# Altium PCB 安装尺寸.PcbDoc
Units mm, origin at the board's own origin, x right, y up, seen from the top; angles counter-clockwise.
Board outline 250 x 140 mm, 2 copper layers (Top Layer, Bottom Layer); 1 components, 0 nets, 11 pads, 0 vias.
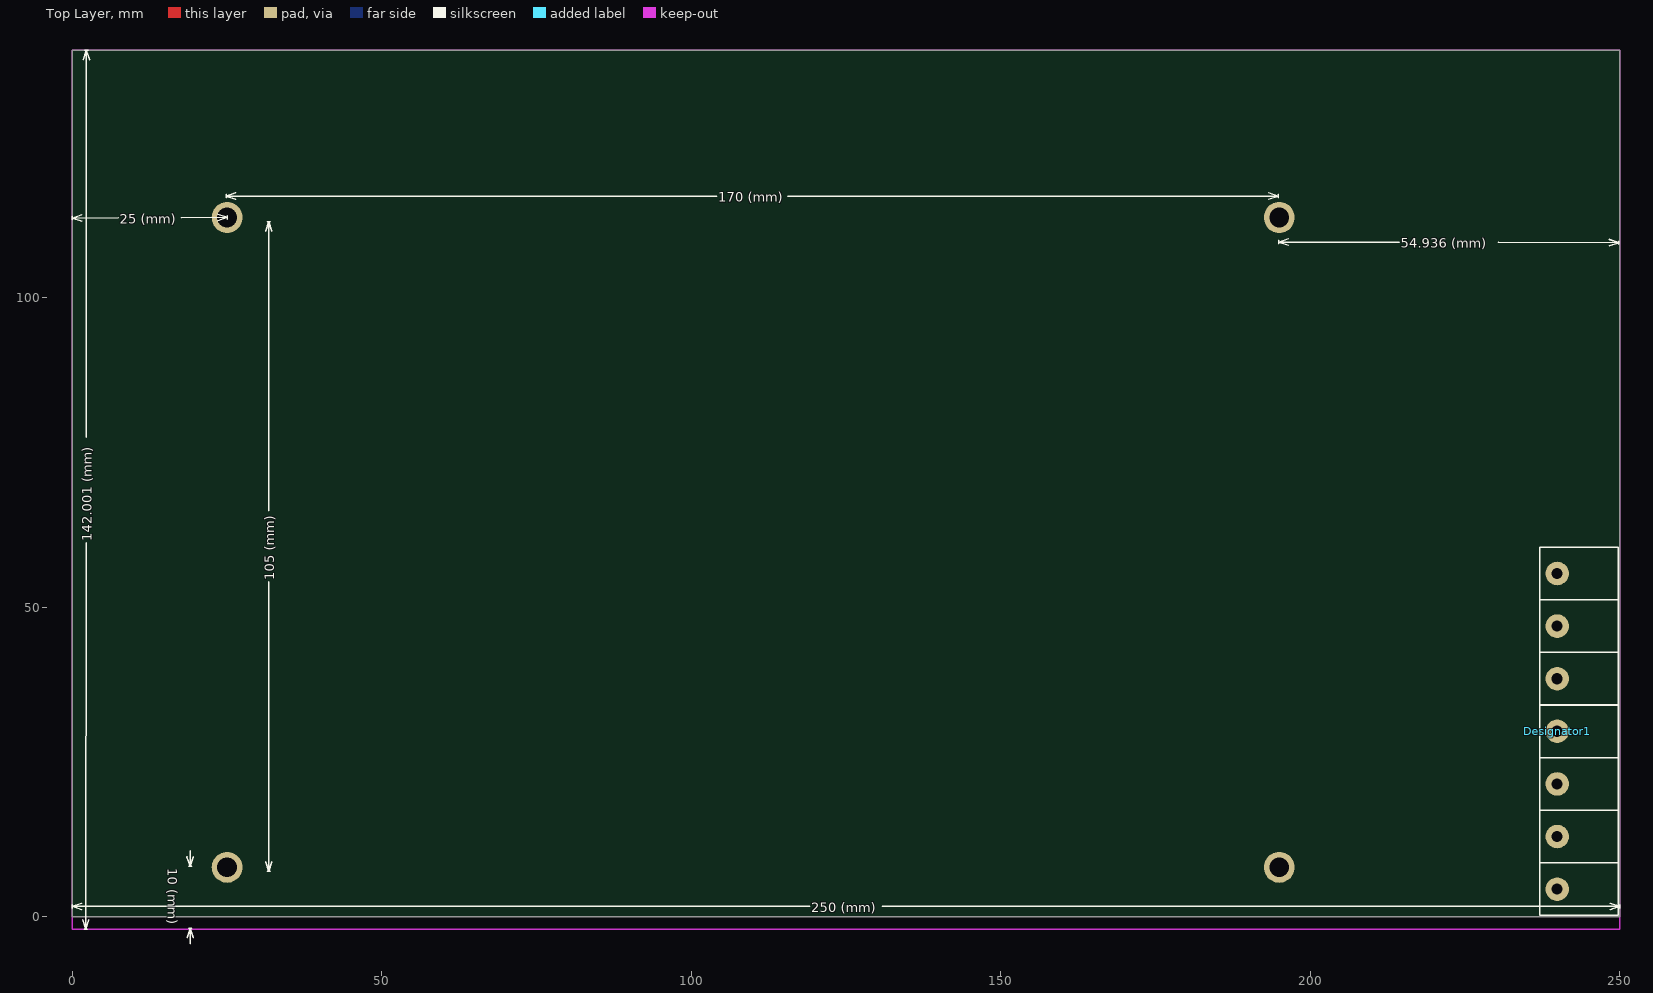
[diagram p0: Top Layer view]
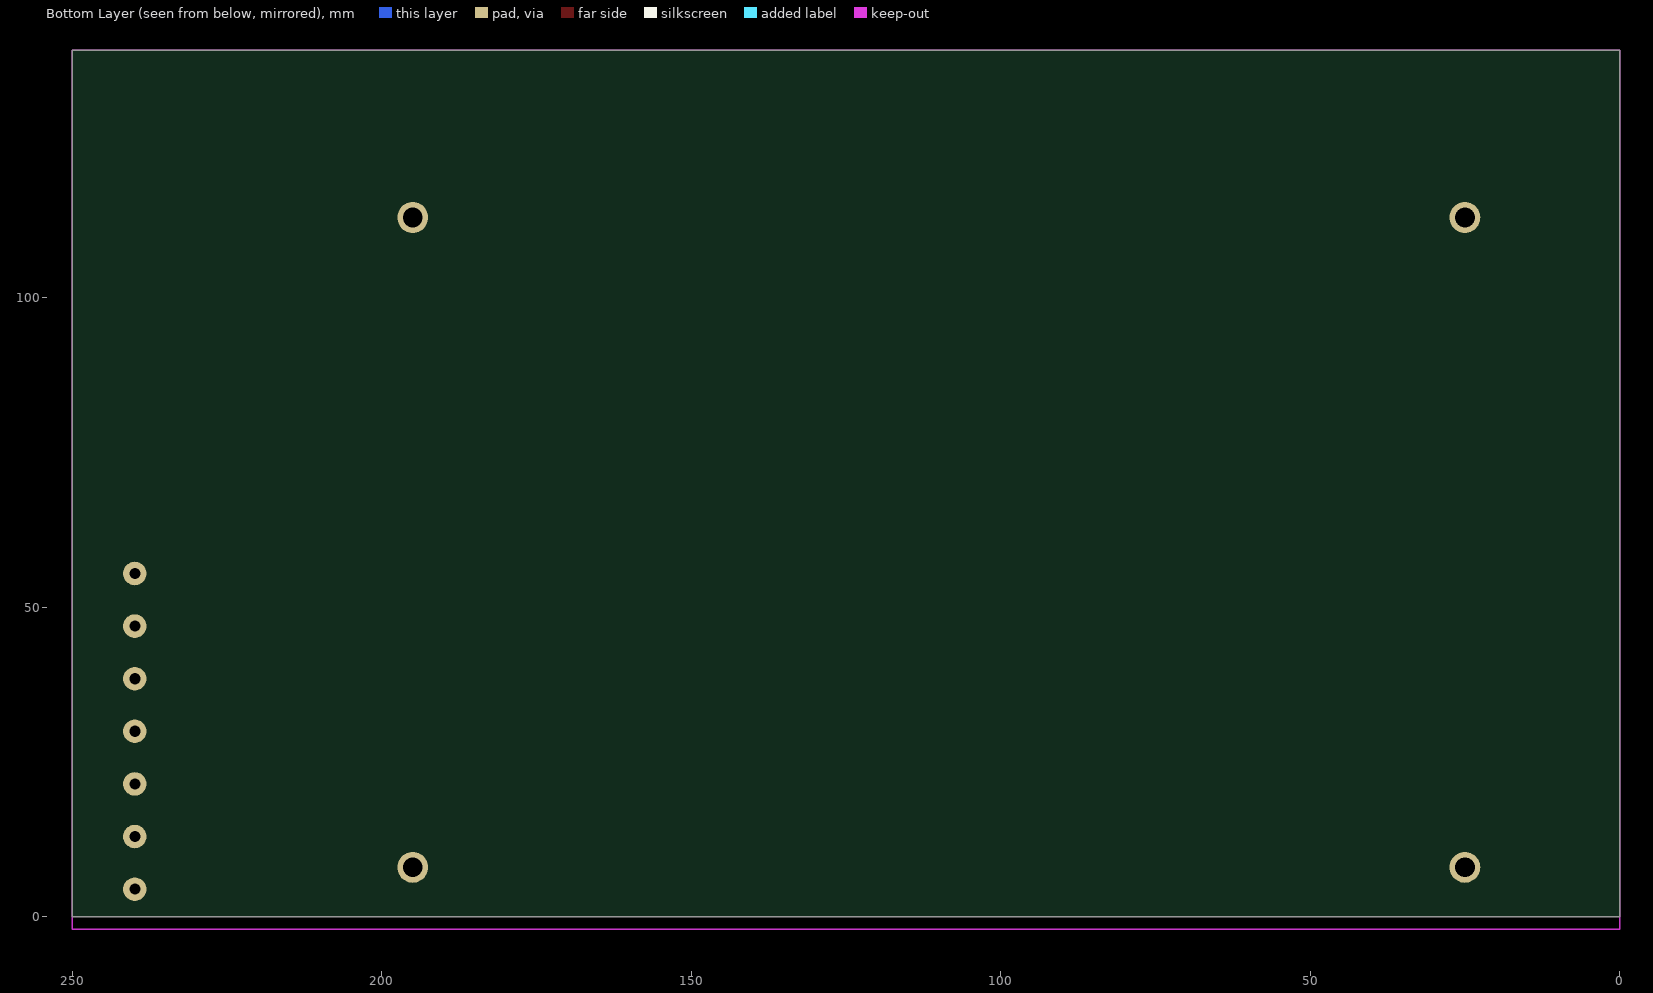
[diagram p1: Bottom Layer view, seen from below]

## Layer stack, top to bottom
Top Layer: signal copper 0.0356
Dielectric: dielectric 0.32, FR-4, Dk 4.8
Bottom Layer: signal copper 0.0356

## Board outline
0,0 0,140 250,140 250,0

## Design rules (kind name [scope] priority, off if disabled: settings)
Clearance [All] p1: gap=0.254
PolygonConnect [All] p1: connectstyle=Relief reliefconductorwidth=0.254 reliefentries=4 polygonreliefangle="90 Angle"
RoutingVias [All] p1: holewidth=0.711 width=1.27 viastyle="Through Hole" minholewidth=0.711 minwidth=1.27 maxholewidth=0.711 maxwidth=1.27
SilkscreenOverComponentPads [All] p1: minsilkscreentomaskgap=0.254
SolderMaskExpansion [All] p1: expansion=0.102
Width [All] p1: maxlimit=0.254 minlimit=0.254 preferedwidth=0.254
27 further rules are at their usual default settings.

## Components (designator, comment, footprint, x,y, rotation, side; value= is the part's Value field where it differs from the comment)
Designator1 "Comment" HEADER1X7 239.903,29.972 r0 top

## Footprints (in the part's own frame and the unit in brackets; to place one, negate y for a bottom-side part, rotate by r counter-clockwise, add the part's x,y. Pads: shape width x height; smd on the part's side, far side on the other; paste and mask are expansions set on the pad)
HEADER1X7 [mm]
  round 3.8 hole 1.8: 1(0,-25.5) 2(0,-17) 3(0,-8.5) 4(0,0) 5(0,8.5) 6(0,17) 7(0,25.5)
  silkscreen extent -2.8,-29.75 9.9,29.75

## Free pads (board coordinates)
  round 5 hole 3.2: ""(25,8) ""(25,113) ""(195,8) ""(195,113)

## Nets (pads, with @x,y where several pads share a name; then routed paths per layer and width w, separated by ;. In a path a pad name is that pad's centre, name@x,y a point inside that pad or via, vN(x,y) a via of type N, cw(c..) or ccw(c..) an arc to the next point about the centre after c; other vN are vias at no path point)
pads on no net: Designator1.1 Designator1.2 Designator1.3 Designator1.4 Designator1.5 Designator1.6 Designator1.7

## Keep-outs
Keep-Out Layer:
  lines w0.254: 0,-2 0,140 250,140 250,-2 0,-2

## Silkscreen, mask and mechanical layers (free items; w line width, h text height)
Top Overlay:
  lines w0.254: -0.008,1.422 -0.008,1.93 ; -0.001,113.157 0.001,112.649 ; 1.516,1.168 -0.008,1.676 ; 1.516,2.184 -0.008,1.676 ; 1.522,113.417 0,112.903 ; 1.526,112.401 0,112.903 ; 1.652,-0.476 2.159,-2 ; 1.752,138.477 2.261,140.001 ; 1.905,-2 2.413,-2 ; 2.007,140.001 2.515,140 ; 2.204,60.469 2.159,-2 ; 2.216,77.532 2.261,140.001 ; 2.668,-0.476 2.159,-2 ; 2.768,138.476 2.261,140.001 ; 7.396,112.932 0,112.903 ; 17.604,112.971 25,113 ; 18.512,9.681 19.023,8.158 ; 18.537,-3.367 19.042,-1.842 ; 18.769,8.158 19.277,8.159 ; 18.788,-1.842 19.296,-1.841 ; 19.018,10.698 19.023,8.158 ; 19.047,-4.382 19.042,-1.842 ; 19.528,9.683 19.023,8.158 ; 19.553,-3.365 19.042,-1.842 ; 23.474,113.502 25,113 ; 23.478,112.486 25,113 ; 24.831,116.205 24.831,116.713 ; 24.999,113.254 25.001,112.746 ; 26.355,115.951 24.831,116.459 ; 26.355,116.967 24.831,116.459 ; 31.217,8.865 31.725,7.341 ; 31.217,110.817 31.725,112.341 ; 31.471,7.341 31.979,7.341 ; 31.471,112.341 31.979,112.341 ; 31.725,54.102 31.725,7.341 ; 31.725,65.579 31.725,112.341 ; 32.233,8.865 31.725,7.341 ; 32.233,110.817 31.725,112.341 ; 104.093,116.459 24.831,116.459 ; 115.57,116.459 194.831,116.459 ; 119.126,1.676 -0.008,1.676 ; 130.857,1.676 249.992,1.676 ; 193.307,115.951 194.831,116.459 ; 193.307,116.967 194.831,116.459 ; 194.831,116.205 194.831,116.713 ; 194.933,108.772 194.934,109.28 ; 196.457,108.515 194.934,109.026 ; 196.458,109.531 194.934,109.026 ; 214.378,108.992 194.934,109.026 ; 230.425,108.963 249.87,108.929 ; 248.345,108.424 249.87,108.929 ; 248.346,109.44 249.87,108.929 ; 248.468,1.168 249.992,1.676 ; 248.468,2.184 249.992,1.676 ; 249.869,108.675 249.87,109.183 ; 249.992,1.422 249.992,1.93
  text "170 (mm)" at 104.347,115.545 h1.52
  text "25 (mm)" at 7.654,112.019 h1.52 r0.22
  text "54.936 (mm)" at 214.63,108.077 h1.52 r359.9
  text "142.001 (mm)" at 3.118,60.722 h1.52 r89.96
  text "105 (mm)" at 32.639,54.356 h1.52 r90
  text "10 (mm)" at 15.367,7.874 h1.52 r270.11
  text "250 (mm)" at 119.38,0.762 h1.52